# Altium PCB PCB1(zadanie_11).PcbDoc
Units mm, origin at the board's own origin, x right, y up, seen from the top; angles counter-clockwise.
Board outline 161 x 63.38 mm, 4 copper layers (Top Layer, Layer 1, Layer 2, Bottom Layer), stack 1.889 mm thick; 49 components, 73 nets, 316 pads, 219 vias.
Unrouted connection lines stored in the file: 1.
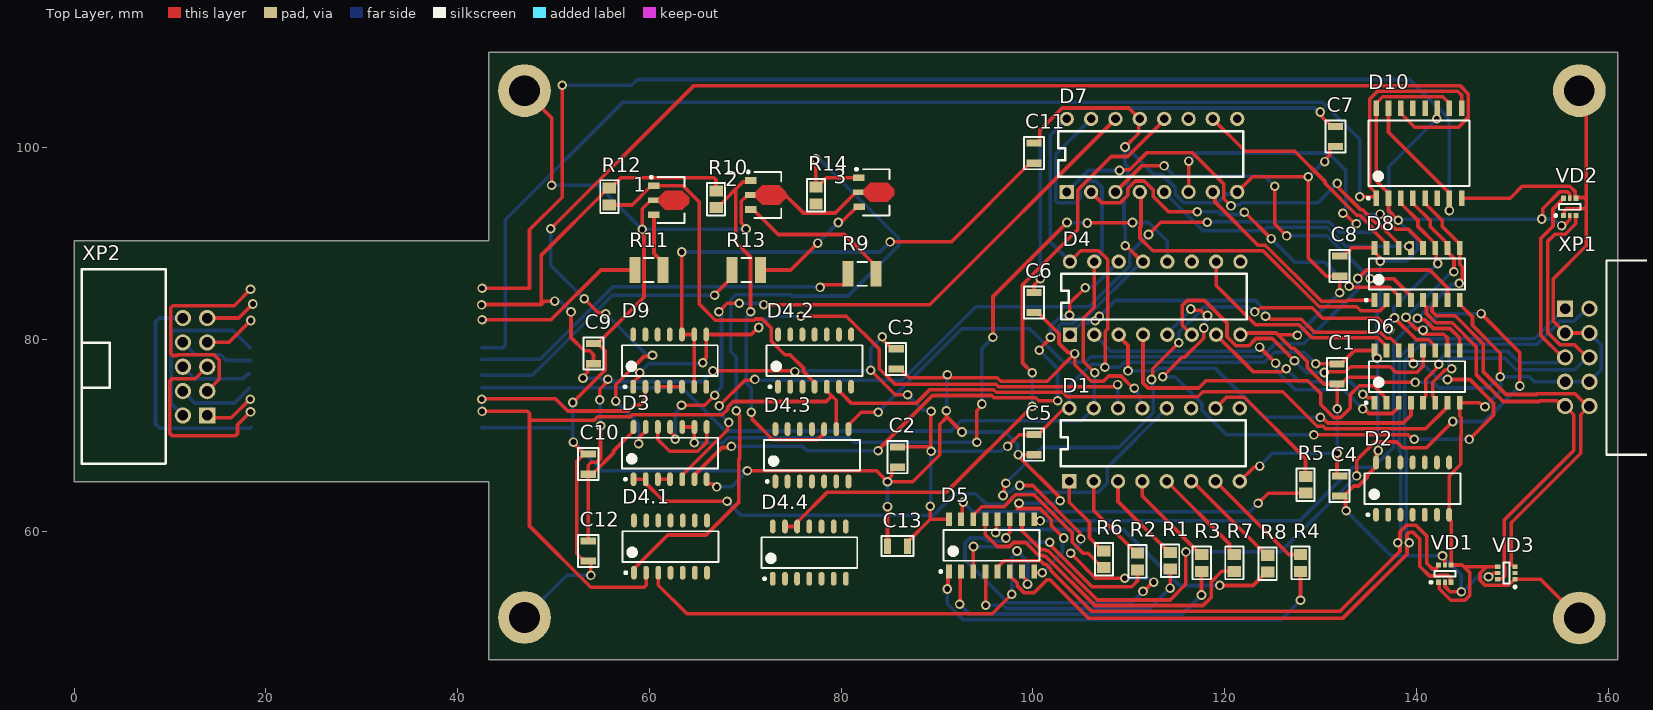
[diagram p0: Top Layer view]
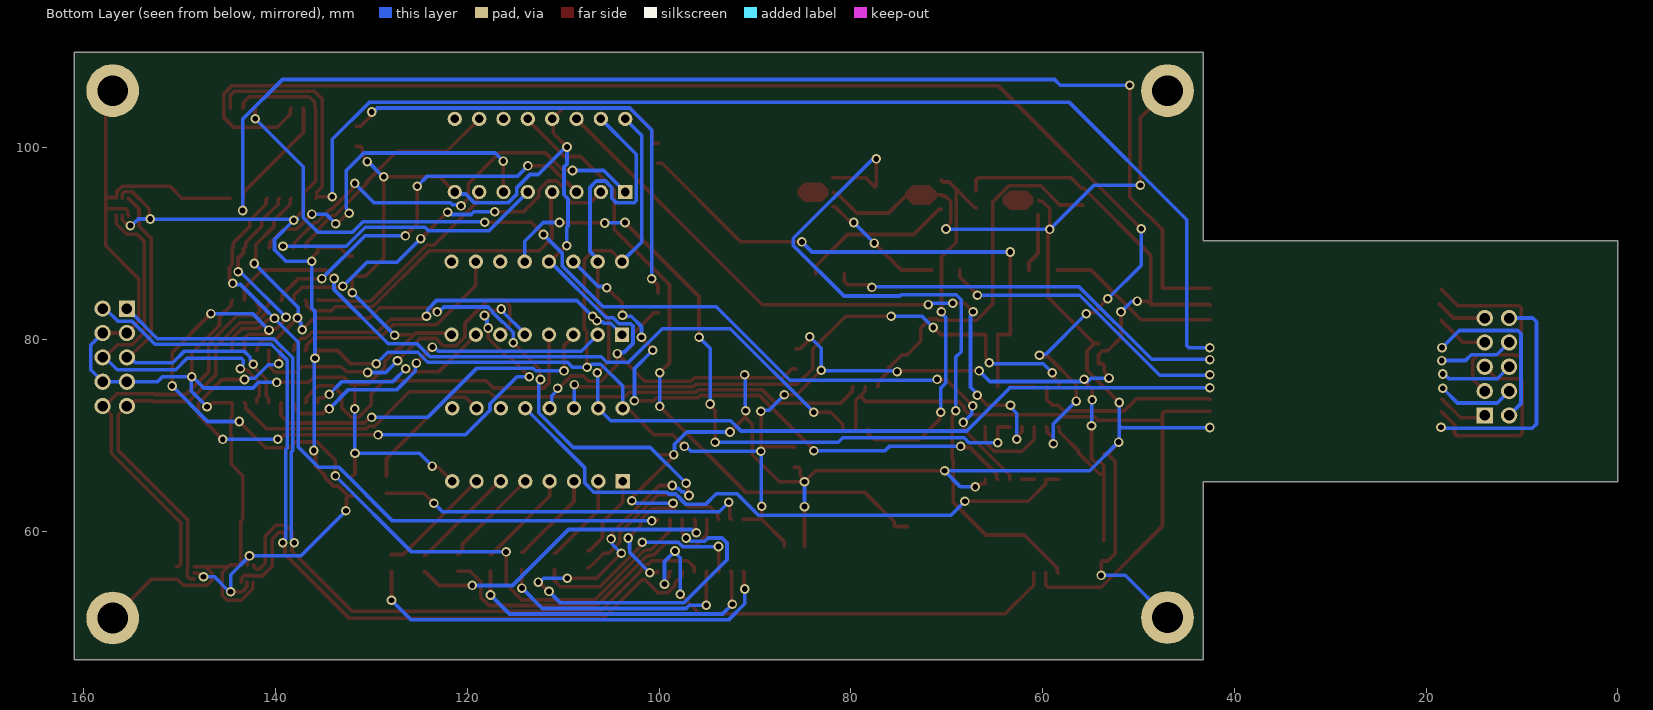
[diagram p1: Bottom Layer view, seen from below]
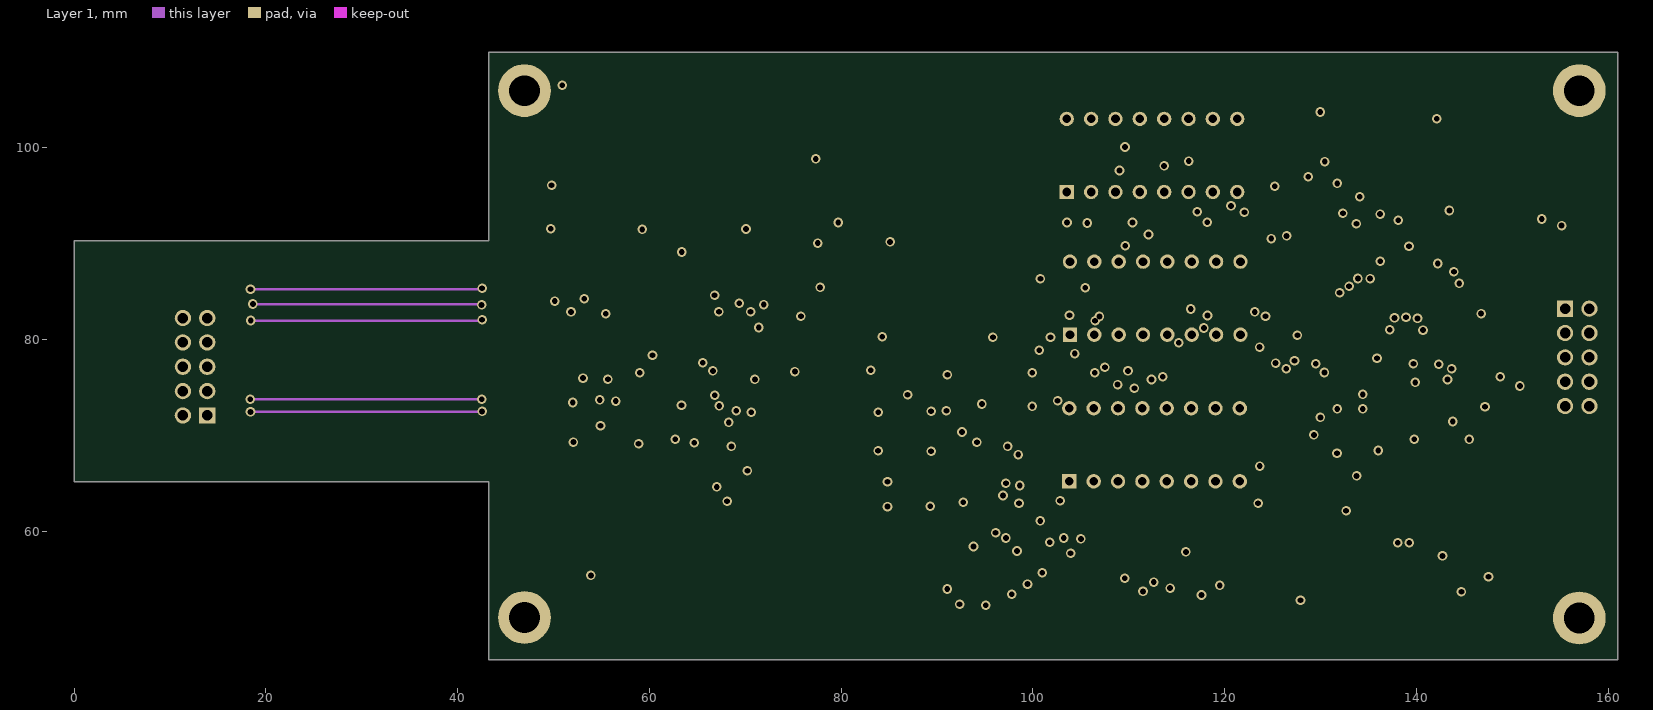
[diagram p2: Layer 1]
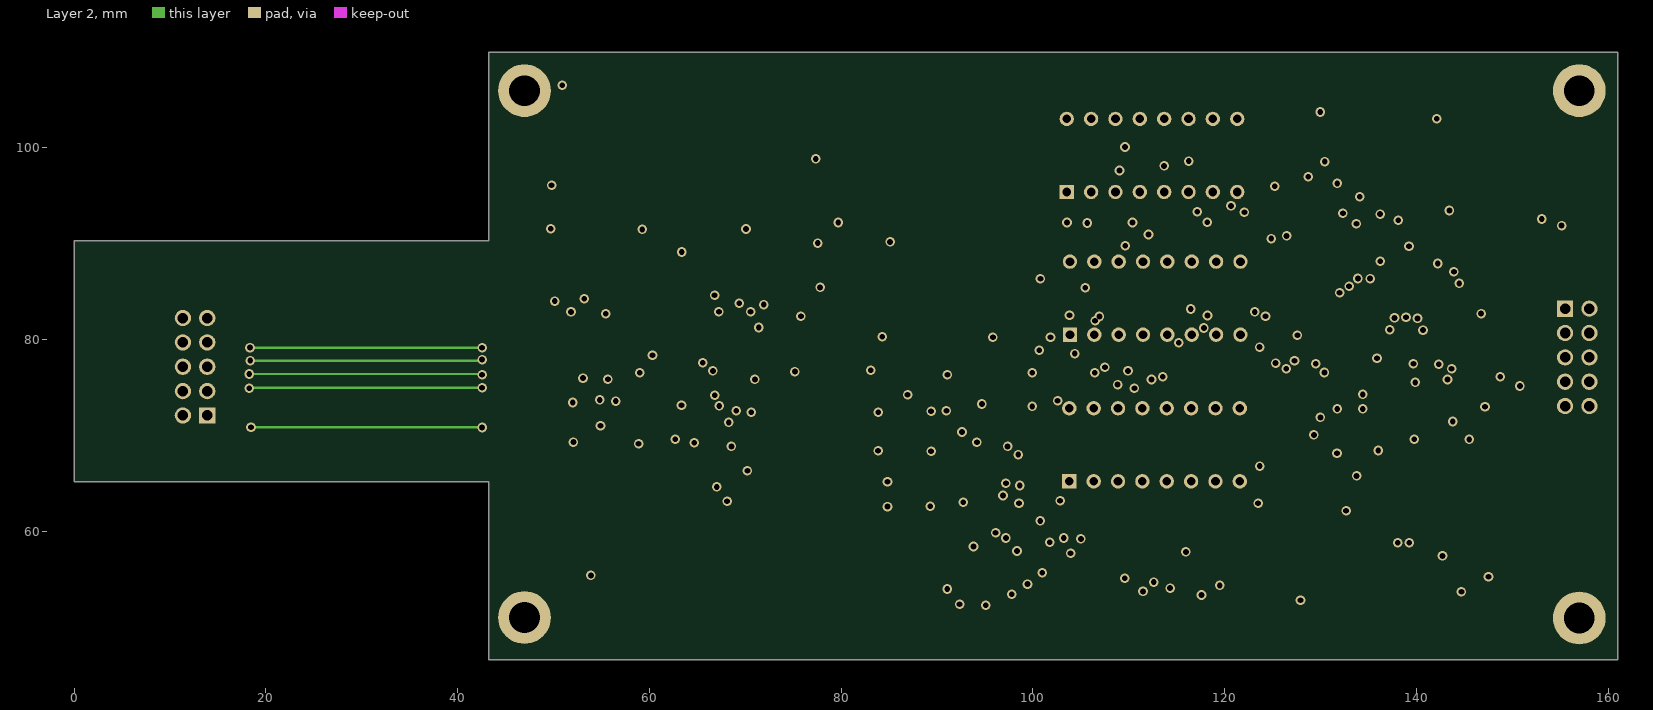
[diagram p3: Layer 2]
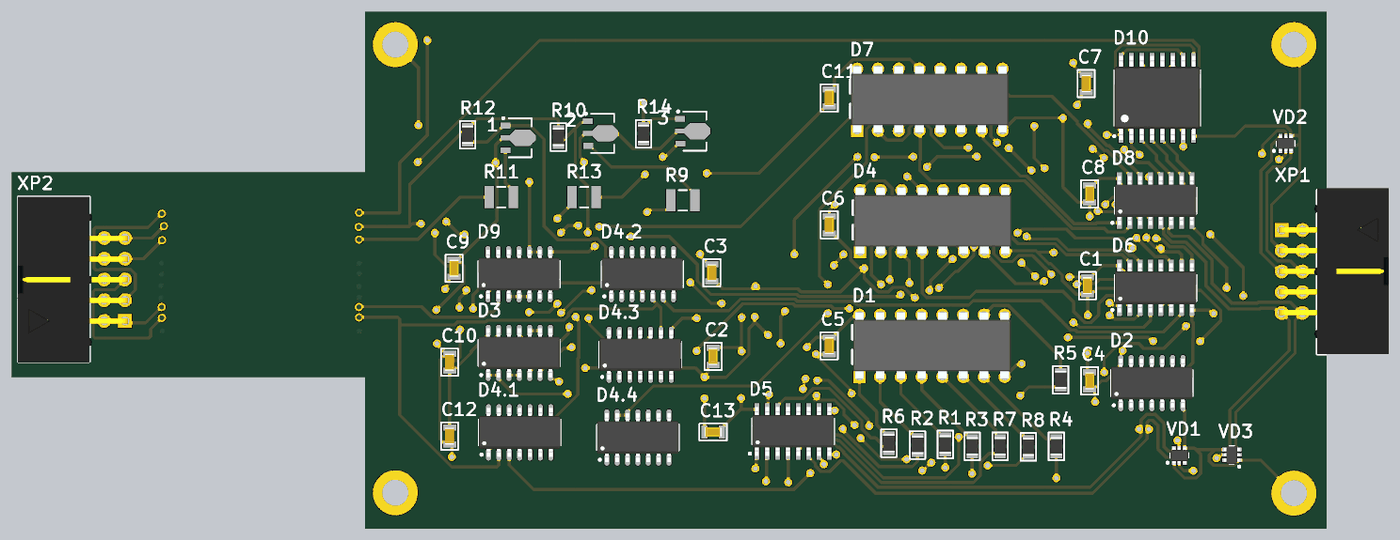
[diagram p4: 3D render of the assembled board from above, using the file's embedded part models]

## Layer stack, top to bottom
Top Solder: solder mask 0.0254, SM-001, Dk 4
Top Layer: signal copper 0.018
Dielectric 4: prepreg 0.0711, PP-006, Dk 4.1
Dielectric 2: prepreg 0.0711, PP-006, Dk 4.1
Layer 1: signal copper 0.035
Dielectric 1: core 1.499, Core-043, Dk 4.3
Layer 2: signal copper 0.035
Dielectric 3: prepreg 0.0711, PP-006, Dk 4.1
Dielectric 5: prepreg 0.0711, PP-006, Dk 4.1
Bottom Layer: signal copper 0.018
Bottom Solder: solder mask 0.0254, SM-001, Dk 4

## Board outline
43.25,65.2 43.25,46.625 160.925,46.625 160.975,46.675 161.004,46.654 161.004,47.972 161,48 161,110 43.25,110 43.25,90.325 0,90.325 0,65.2
board region "Layer Stack Region 1": 17.55,90.325 43.25,90.325 43.25,65.2 17.6,65.2
board region "Layer Stack Region 1": 17.6,65.2 0,65.2 0,90.325 17.55,90.325
board region "Layer Stack Region 1": 43.25,110 161,110 161,48 161.004,47.972 161.004,46.654 160.975,46.675 160.925,46.625 43.25,46.625

## Design rules (kind name [scope] priority, off if disabled: settings)
Clearance [All] p1: gap=0.2 ignorepadtopadclearanceinfootprint=FALSE
DiffPairsRouting [All] p1: maxlimit=0.77 minlimit=0.2 mostfreqgap=0.35 toplayer_minwidth=0.2 toplayer_maxwidth=0.5 toplayer_prefwidth=0.38 midlayer1_mingap=0.254 midlayer1_maxgap=0.254 midlayer1_prefgap=0.254 midlayer1_minwidth=0.381 midlayer1_maxwidth=0.381 midlayer1_prefwidth=0.381 midlayer2_mingap=0.254 midlayer2_maxgap=0.254 midlayer2_prefgap=0.254 midlayer2_minwidth=0.381 midlayer2_maxwidth=0.381 midlayer2_prefwidth=0.381 bottomlayer_minwidth=0.2 bottomlayer_maxwidth=0.5 bottomlayer_prefwidth=0.38 maxuncoupledlength=12.7
HoleSize [All] p1: absolutevalues=TRUE maxlimit=4.5 minlimit=0.3 maxpercent=80.000 minpercent=20.000
PolygonConnect [All] p1: connectstyle=Relief reliefconductorwidth=0.254 reliefentries=4 polygonreliefangle="90 Angle" airgapwidth=0.254
RoutingVias [All] p1: holewidth=0.6 width=1 viastyle="Through Hole" minholewidth=0.4 minwidth=0.8 maxholewidth=1 maxwidth=1.5
SolderMaskExpansion [All] p1: expansion=0.102 istentingtop=FALSE
Width [All] p1: maxlimit=0.5 minlimit=0.2 preferedwidth=0.38 midlayer1_minwidth=0.254 midlayer1_maxwidth=0.254 midlayer1_prefwidth=0.254 midlayer2_minwidth=0.254 midlayer2_maxwidth=0.254 midlayer2_prefwidth=0.254 minimp=50.000000 maximp=50.000000 favimp=50.000000
28 further rules are at their usual default settings.

## Classes and differential pairs
component class МИЭТ_8161930_003_Э3_Лист_2: 1 2 3 C11 C12 C13 D9 D10 R12 R14 XP2 Р3
component class МИЭТ_8161930_003_Э3_Лист_1: C1 C2 C3 C4 C5 C6 C7 C8 C9 C10 D1 D2 D3 D4 D4.1 D4.2 D4.3 D4.4 D5 D6 D7 D8 R1 R2 R3 R4 R5 R6 R7 R8 VD1 VD2 VD3 XP1
differential pair L3: +L3_P -L3_N
differential pair L2: +L2_P -L2_N
differential pair L1: +L1_P -L1_N

## Components (designator, comment, footprint, x,y, rotation, side; value= is the part's Value field where it differs from the comment)
1 "Транзистор" SOT89-150P340X160-3N 62,94.55 r0 top
2 "Транзистор" SOT89-150P340X160-3N 72.1,95.1 r0 top
3 "Транзистор" SOT89-150P340X160-3N 83.4,95.375 r0 top
C1 "" 0805_N 131.7,76.425 r90 top
C2 "" 0805_N 85.875,67.75 r90 top
C3 "" 0805_N 85.725,78 r90 top
C4 "" 0805_N 131.975,64.75 r90 top
C5 "" 0805_N 100.1,69.05 r90 top
C6 "" 0805_N 100.1,83.875 r90 top
C7 "" 0805_N 131.55,101.2 r270 top
C8 "" 0805_N 131.975,87.675 r90 top
C9 "" 0805_N 54.175,78.55 r90 top
C10 "" 0805_N 53.625,67.025 r90 top
C11 "" 0805_N 100.1,99.45 r270 top
C12 "" 0805_N 53.625,57.975 r90 top
C13 "" 0805_N 85.875,58.475 r180 top
D1 "DIP-16" DIP16 103.79,65.23 r90 top
D2 "74AC00SC" SO14-N 139.585,64.475 r90 top
D3 "74AC00SC" SO14-N 62.155,68.175 r90 top
D4 "DIP-16" DIP16 103.855,80.525 r90 top
D4.1 "74AC00SC" SO14-N 62.2,58.425 r90 top
D4.2 "74AC00SC" SO14-N 77.225,77.825 r90 top
D4.3 "74AC00SC" SO14-N 76.95,67.95 r90 top
D4.4 "74AC00SC" SO14-N 76.675,57.8 r90 top
D5 "SOIC-16" SO16-N 95.675,58.55 r90 top
D6 "SOIC-16" SO16-N 140.05,76.15 r90 top
D7 "DIP-16" DIP16 103.52,95.405 r90 top
D8 "SOIC-16" SO16-N 140.05,86.85 r90 top
D9 "74AC00SC" SO14-N 62.125,77.825 r90 top
D10 "MC14520BDWG" SOIC-16W-N 140.25,99.45 r90 top
R1 "0805" RES_0805_2012_N 114.3,56.95 r270 top
R2 "0805" RES_0805_2012_N 110.9,56.875 r270 top
R3 "0805" RES_0805_2012_N 117.6,56.725 r270 top
R4 "0805" RES_0805_2012_N 127.9,56.725 r270 top
R5 "0805" RES_0805_2012_N 128.425,64.875 r270 top
R6 "0805" RES_0805_2012_N 107.4,57.1 r270 top
R7 "0805" RES_0805_2012_N 121,56.725 r270 top
R8 "0805" RES_0805_2012_N 124.475,56.65 r270 top
R9 "Резистор" CAPC3225X06N 82.175,86.875 r0 top
R10 "0805" RES_0805_2012_N 66.95,94.65 r90 top
R11 "Резистор" CAPC3225X06N 59.95,87.275 r0 top
R12 "0805" RES_0805_2012_N 55.825,94.925 r90 top
R13 "Резистор" CAPC3225X06N 70.1,87.275 r0 top
R14 "0805" RES_0805_2012_N 77.375,95.05 r90 top
VD1 "SOT-363" SOT363_NXP 142.95,55.6 r90 top
VD2 "SOT-363" SOT363_NXP 155.975,93.85 r90 top
VD3 "SOT-363" SOT363_NXP 149.375,55.675 r180 top
XP1 "TE_1-1634689-0" BH-10R 156.755,78.16 r180 top
XP2 "TE_1-1634689-0" BH-10R 12.62,77.18 r0 top

## Footprints (in the part's own frame and the unit in brackets; to place one, negate y for a bottom-side part, rotate by r counter-clockwise, add the part's x,y. Pads: shape width x height; smd on the part's side, far side on the other; paste and mask are expansions set on the pad)
0805_N [mm] "Резистор, конденсатор"
  rect 0.75x1.6 smd: 1(-1.05,0) 2(1.05,0)
  silkscreen extent -1.68,-1.05 1.68,1.05, body extent -1.05,-0.58 1.05,0.58, height 1
BH-10R [mm] "Разъем угловой 2х5х2,54 типа ВН"
  rect 1.7x1.7 hole 1.1: 1(1.27,-5.08)
  round 1.7 hole 1.1: 2(-1.27,-5.08) 3(1.27,-2.54) 4(-1.27,-2.54) 5(1.27,0) 6(-1.27,0) 7(1.27,2.54) 8(-1.27,2.54) 9(1.27,5.08) 10(-1.27,5.08)
  silkscreen extent -11.8,-10.1 -3.05,10.15, body extent -11.85,-10.2 1.65,10.15, height 9.13
CAPC3225X06N [mm] "Chip Capacitor, 2-Leads, Body 3,20x2,50mm, IPC Medium Density"
  rect 1.15x2.7 smd: 1(-1.475,0) 2(1.475,0)
  silkscreen extent -0.5,-1.25 0.5,1.25, body extent -1.7,-1.35 1.7,1.35, height 0.6
DIP16 [mm]
  rect 1.5x1.5 hole 0.9: 1(0,0)
  round 1.5 hole 0.9: 2(0,-2.54) 3(0,-5.08) 4(0,-7.62) 5(0,-10.16) 6(0,-12.7) 7(0,-15.24) 8(0,-17.78) 9(7.62,-17.78) 10(7.62,-15.24) 11(7.62,-12.7) 12(7.62,-10.16) 13(7.62,-7.62) 14(7.62,-5.08) 15(7.62,-2.54) 16(7.62,0)
  silkscreen extent 1.58,-18.41 6.35,0.89, body extent -0.25,-18.54 7.95,0.76, height 5.08
RES_0805_2012_N [mm] "Rezistor 0805"
  rect 1.15x1.4 smd: 1(-0.875,0) 2(0.875,0)
  silkscreen extent -1.7,-0.95 1.7,0.95, body extent -1.1,-0.7 1.1,0.7, height 0.6
SO14-N [mm]
  oval 1.45x0.6 smd: 1(-2.725,3.81) 2(-2.725,2.54) 3(-2.725,1.27) 4(-2.725,0) 5(-2.725,-1.27) 6(-2.725,-2.54) 7(-2.725,-3.81) 8(2.725,-3.81) 9(2.725,-2.54) 10(2.725,-1.27) 11(2.725,0) 12(2.725,1.27) 13(2.725,2.54) 14(2.725,3.81)
  silkscreen extent -2.85,-5 1.6,5, body extent -3,-5 3,5, height 1.45
SO16-N [mm] "SOIC, 16-Leads, Body 9,90x3,90mm, Pitch 1,27mm, IPC Medium Density"
  rect 1.45x0.6 smd: 1(-2.725,4.445) 2(-2.725,3.175) 3(-2.725,1.905) 4(-2.725,0.635) 5(-2.725,-0.635) 6(-2.725,-1.905) 7(-2.725,-3.175) 8(-2.725,-4.445) 9(2.725,-4.445) 10(2.725,-3.175) 11(2.725,-1.905) 12(2.725,-0.635) 13(2.725,0.635) 14(2.725,1.905) 15(2.725,3.175) 16(2.725,4.445)
  silkscreen extent -2.85,-5 1.6,5.42, body extent -3,-5 3,5, height 1.45
SOIC-16W-N [mm] "SOIC, 16-Leads, Body 10,30x7,50mm, Pitch 1,27mm, IPC Medium Density"
  rect 1.62x0.58 smd: 1(-4.69,4.445) 2(-4.69,3.175) 3(-4.69,1.905) 4(-4.69,0.635) 5(-4.69,-0.635) 6(-4.69,-1.905) 7(-4.69,-3.175) 8(-4.69,-4.445) 9(4.69,-4.445) 10(4.69,-3.175) 11(4.69,-1.905) 12(4.69,-0.635) 13(4.69,0.635) 14(4.69,1.905) 15(4.69,3.175) 16(4.69,4.445)
  silkscreen extent -4.81,-5.25 3.4,5.41, body extent -5.15,-5.25 5.15,5.25, height 2.65
SOT89-150P340X160-3N [mm] "SOT89, 3-Leads, Body 4,60x2,60mm, Pitch 1,50mm, Lead Span 3,4mm, IPC Medium Density"
  rect 1.2x0.7 smd: 1(-1.55,1.5) 2(-1.524,-1.524)
  rect 1.1x0.6 smd: 3(-1.6,0)
  Top Layer region: -1.05,0.3 -0.35,1 1.45,1 2.15,0.3 2.15,-0.3 1.45,-1 -0.35,-1 -1.05,-0.3
  silkscreen extent -1.92,-2.4 1.65,2.52, body extent -1.15,-2.4 1.65,2.4, height 1.6
SOT363_NXP [mm]
  rect 0.55x0.5 smd: 1(-0.9,0.65) 3(-0.9,-0.65) 4(0.9,-0.65) 6(0.9,0.65)
  rect 0.55x0.4 smd: 2(-0.9,0) 5(0.9,0)
  silkscreen extent -1.02,-1.1 0.3,1.57, body extent -1.15,-1.1 1.15,1.1, height 1.1

## Part data
1 2 3: "Транзистор 2Т665А9 АЕЯР.432140.605 ТУ"
C1 C2 C3 C4 C5 C6 C7 C8 C9 C10 C11 C12 C13: library part К10-79_0805_Н90, "Чип конденсатор 0805 Н90 ряд Е6", Case=0805, Manufacturer="ООО \"Кулон\"", Tolerance=+80%-20%, BOM="Конденсатор К10-79-*-B-*+80%-20%-Н90 АЖЯР.673511.004 ТУ", Created_by=Желобаев, Issue_date=19_12_2018, Name="Конденсатор К10-79", TKE=Н90, TU="АЖЯР.673511.004 ТУ", Type=K10-79, Version=0, Weight=0.05
D1 D4 D7: library part HCF4017BEY, "Декадный счетчик c 10 декодированными выходами", Manufacturer=STMicroelectronics, Power_Voltage="-0.5 -22 V", BOM="Микросхема HCF4017BEY \"STMicroelectronics\"", Case=DIP-16, Created_by=Желобаев, Issue_date=05.04.2019, Name="Микросхема HCF4017BEY", Version=0
D2 D3 D4.1 D4.2 D4.3 D4.4 D9: "4 элемента 2И-НЕ TTL SOIC-14", Case=SOIC-14, Manufacturer="ON Semiconductor", Power_Voltage="4.5 - 5.5 V", BOM="Микросхема 74AC00SC \"ON Semiconductor\"", Created_by=Желобаев, Issue_date=10.04.2019, Name="Микросхема 74AC00SC", Version=0
D5 D6 D8: library part 74HC151D, "мультиплексор 8 канальный CMOS", Manufacturer="NXP Semiconductors", Power_Voltage="2.0 -6.0 V", BOM="Микросхема 74YC151D \"NXP Semiconductors\"", Case=SOIC-16, Created_by=Желобаев, Issue_date=05.04.2019, Name="Микросхема 74YC151D", Version=0
D10: "Два двоичных счетчика", Case=SOIC-16, Manufacturer=Motorola, BOM="Микросхема MC14520BDWG \"Motorola\"", Created_by=Желобаев, Issue_date=6.01.2019, Name="Микросхема MC14520BDWG", Version=0
R1 R2 R3 R4 R5 R6 R7 R8 R10 R12 R14: library part Р1-12-0,125-5%, "Резистор от 0,75 Ом до 2 МОм", Manufacturer="ОАО \"НПО \"Эркон\"", Tolerance=5%, Voltage=150, BOM="Резистор Р1-12-0,125 * 5%-M-\"A\" АЛЯР.434110.005 ТУ", ComponentLink1Description="Сайт производителя", ComponentLink1URL=https://www.erkon-nn.ru/catalog/rezistory-obshchego-primeneniya/, Created_by=Желобаев, Hight=0,5, Issue_date=05_12_2018, LiveStatus=Производится, Name="Резистор Р1-12-0,125", Reliability=0,000001, Size=0805, TKR=M, TU="АЛЯР.434110.005 ТУ", Type="Р1-12-0,125±5%-М-\"А\"", Version=00, Weight=0,01
R9 R11 R13: "Резистор Р1-12-0,1 4,7 кОм 5%-M-\"A\" АЛЯР.434110.005 ТУ"
VD1 VD2 VD3: library part BAV99S, "Высокоскоростные, переключающие диоды", Manufacturer=Nexperia, Voltage=100, BOM="Диод BAV99S \"Nexperia\"", Case=SOT-363, Created_by=Желобаев, Issue_date=07.01.2019, Name="Диод BAV99S", Version=0
XP1 XP2: "Вилка типа BH-10R угловая правая двухрядная 2х5х2.54", Case=BH-10R, Manufacturer="TE Connectivity", BOM="Вилка угловая TE_1-1634689-0 \"TE Connectivity\"", Created_by=Желобаев, Issue_date=13.05.2019, Name="Вилка угловая TE_1-1634689-0", Version=0

## Free pads (board coordinates)
  round 5.5 hole 3.2: 1(-315.3,94.275) M1(46.975,51.025) M2(46.975,105.975) M3(156.975,105.975) M4(156.975,50.975)

## Via types
v1: diameter 1, hole 0.6, Top Layer to Bottom Layer, 199 vias
v2: diameter 1, hole 0.6, Top Layer to Layer 1, 10 vias
v3: diameter 1, hole 0.6, Layer 2 to Bottom Layer, 10 vias

## Nets (pads, with @x,y where several pads share a name; then routed paths per layer and width w, separated by ;. In a path a pad name is that pad's centre, name@x,y a point inside that pad or via, vN(x,y) a via of type N, cw(c..) or ccw(c..) an arc to the next point about the centre after c; other vN are vias at no path point)
+5: C1.2 C2.2 C3.2 C4.1 C5.2 C8.2 C9.1 C10.1 C12.2 C13.1 D1.16 D2.14 D3.14 D4.16 D5.16 D6.16 D7.16 D8.16 D10.2 D10.10 D10.16 R10.2 R12.2 VD1.2 VD1.5 VD2.2 VD2.5 VD3.2 VD3.5 XP2.9 | length 366.5
  Top Layer w0.38: XP2.9 17.185,82.26 v2(18.65,83.725) ; v2(42.5,83.625) 42.575,83.625 42.625,83.675 48.725,83.675 48.74,83.69 ; v1(50.125,84.025) 50.105,84.005 49.055,84.005 48.74,83.69 ; v1(51.825,82.9) 51.825,80.223 53.213,78.835 53.785,78.835 54.175,78.445 C9.1 53.75,77.5 53.565,77.315 53.565,76.658 53.075,76.168 v1(53.075,76) ; C12.2 C10.1 ; v1(54.825,73.725) 54.825,74.849 55.674,75.697 v1(55.674,75.865) ; v1(54.9,71.025) 54.9,67.623 54.506,67.229 53.934,67.229 53.625,66.92 C10.1 ; D3.14 58.273,70.828 58.273,70.403 56.254,68.384 56.254,68.179 54.05,65.975 C10.1 ; v1(66.625,76.75) 75.1,76.75 v1(75.175,76.675) ; R10.2 66.95,96.67 66.727,96.893 57.043,96.893 55.95,95.8 55.7,95.8 48.74,88.84 48.74,83.69 ; v1(83.075,76.825) 85.65,74.25 v1(86.925,74.25) ; v1(84.275,80.3) 84.394,80.181 84.394,79.956 85.3,79.05 C3.2 ; C2.2 85.913,68.838 v1@89.338,68.838 ; C13.1 86.925,58.9 89.3,61.275 ; v1(89.3,62.625) 89.3,61.275 ; v1(89.375,68.36) 89.338,68.397 v1@89.338,68.838 ; v1(89.375,72.535) 89.338,72.498 v1@89.338,68.838 ; D5.16 89.3,61.275 ; v1(97.35,68.875) 98.562,70.087 100.087,70.087 C5.2 100.525,70.1 103.061,72.636 103.576,72.636 D1.16 ; D4.16 104.995,89.285 106.867,89.285 107.795,88.357 107.795,84.761 107.815,84.741 107.815,81.176 107.535,80.896 107.535,77.163 v1(107.501,77.129) ; v1(129.494,77.486) 129.5,77.481 131.694,77.481 C1.2 132.125,77.475 133.525,78.875 D6.16 135.605,78.45 v1@135.961,78.094 ; C4.1 C4.1@132.4,63.7 ; C8.2 132.4,88.725 133.25,89.575 D8.16 135.605,89.15 v1@136.106,88.649 ; v1(132.65,62.175) 132.585,62.24 132.585,63.515 C4.1@132.4,63.7 ; v1@135.817,68.099 135.817,66.817 134.83,65.83 134.83,65.622 133.957,64.749 133.449,64.749 C4.1@132.4,63.7 ; v1(138.088,92.471) 137.075,93.484 137.075,95.28 135.805,96.55 D10.16 135.905,104.24 135.905,104.76 136.485,105.34 142.745,105.34 143.325,104.76 143.325,104.24 D10.10 ; v1(142.71,57.456) 142.71,57.289 142.94,57.059 142.94,56.51 VD1.5 ; VD1.2 142.96,54.69 142.96,54.263 143.498,53.725 v1(144.675,53.725) ; v1(147.5,55.275) 147.648,55.275 148.038,55.665 148.465,55.665 VD3.5 ; v1(153.064,92.586) 153.154,92.676 153.154,93.656 154.913,95.415 155.737,95.415 155.965,95.187 155.965,94.76 VD2.5 ; v1(155.125,91.9) 155.244,92.019 155.47,92.019 155.965,92.513 155.965,92.94 VD2.2
  Layer 1 w0.254: v2(18.65,83.725) 18.675,83.7 42.425,83.7 v2(42.5,83.625)
  Bottom Layer w0.38: v1(50.125,84.025) 50.7,84.025 v1(51.825,82.9) ; v1(53.075,76) 54.932,76 55.287,75.646 v1@55.674,75.646 ; v1(54.825,73.725) 54.863,73.688 54.863,71.062 v1(54.9,71.025) ; v1(55.674,75.865) v1@55.674,75.646 ; v1(66.625,76.75) 65.521,75.646 v1@55.674,75.646 ; v1(75.175,76.675) 75.25,76.75 83,76.75 v1(83.075,76.825) 83.075,79.1 v1(84.275,80.3) ; v1(86.925,74.25) 88.521,72.654 89.256,72.654 v1(89.375,72.535) ; v1(89.3,62.625) 89.337,62.663 89.337,68.322 v1(89.375,68.36) ; v1@89.3,68.36 96.667,68.36 97.182,68.875 v1(97.35,68.875) ; D7.16 101.8,101.305 101.8,90.2 D4.16 ; D1.16 103.79,75.172 106.073,77.455 107.007,77.455 107.333,77.129 v1(107.501,77.129) ; v1@107.501,77.122 107.508,77.129 109.029,77.129 109.54,77.64 124.116,77.64 125.166,78.69 128.29,78.69 v1(129.494,77.486) ; v1(132.65,62.175) 137.369,57.456 v1(142.71,57.456) 144.675,55.491 v1(144.675,53.725) 144.805,53.725 146.355,55.275 v1(147.5,55.275) ; v1(135.879,78.075) v1@136.125,78.075 ; v1(136,68.45) 135.94,68.51 135.94,77.89 v1@136.125,78.075 ; v1@137.67,92.586 138.088,92.586 138.111,92.563 153.182,92.563 153.205,92.586 154.298,92.586 154.984,91.9 v1(155.125,91.9) ; v1(138.088,92.471) 140.105,90.454 140.105,89.372 138.908,88.175 v1(136.225,88.175) 136.225,83.298 135.879,82.952 135.879,78.321 v1@136.125,78.075
Canal16_0: D4.3 D6.4 | length 37.8
  Top Layer w0.38: D4.3 108.935,80.368 109.909,79.395 v1(109.909,76.75) ; v1(129.975,71.9) 130.143,71.9 130.733,71.31 138.595,71.31 139.415,72.13 D6.4
  Bottom Layer w0.38: v1(109.909,76.75) 112.866,76.75 113.156,77.04 118.992,77.04 124.132,71.9 v1(129.975,71.9)
Canal16_1: D4.2 D6.3 | length 36.7
  Top Layer w0.38: v1@123.632,79.234 v1@125.3,77.566 ; v1(134.4,72.78) 134.568,72.78 135.038,72.31 137.455,72.31 138.035,72.89 138.035,73.315 D6.3
  Bottom Layer w0.38: D4.2 108.12,78.8 123.03,78.8 123.465,79.235 v1(123.632,79.235) ; v1(125.3,77.565) 125.419,77.446 125.419,76.701 127.32,74.8 132.38,74.8 v1(134.4,72.78)
Canal16_2: D4.4 D6.2 | length 36.4
  Top Layer w0.38: D4.4 111.473,80.523 111.473,75.481 111.994,74.96 117.275,74.96 118.05,75.735 128.668,75.735 130.02,74.383 130.02,73.242 131.371,71.89 132.109,71.89 133.07,72.851 133.07,74.229 134.031,75.19 135.535,75.19 136.765,73.96 136.765,73.535 D6.2
Canal16_3: D4.7 D6.1 | length 19.9
  Top Layer w0.38: D4.7 122.945,76.675 125.955,76.675 126.245,76.965 v1(126.413,76.965) ; v1(134.4,74.3) 134.568,74.3 134.908,73.96 135.495,73.96 135.605,73.85 D6.1
  Bottom Layer w0.38: v1(126.413,76.965) 127.746,75.633 133.068,75.633 v1(134.4,74.3)
Canal16_4: D4.10 D6.15 | length 23.3
  Top Layer w0.38: D4.10 119.095,85.678 123.213,81.56 127.749,81.56 129.106,80.203 135.972,80.203 136.765,79.41 136.765,78.985 D6.15
Canal16_5: D4.1 D6.14 | length 38.5
  Top Layer w0.38: v1(106.473,81.973) v1(106.925,82.425) ; v1(124.25,82.45) 124.418,82.45 124.728,82.14 127.989,82.14 129.346,80.783 136.213,80.783 136.849,80.146 137.299,80.146 138.035,79.41 138.035,78.985 D6.14
  Bottom Layer w0.38: D4.1 105.035,81.705 105.748,81.705 105.897,81.854 106.354,81.854 v1(106.473,81.973) ; v1(106.925,82.425) 108.59,84.09 123.2,84.09 124.131,83.159 124.131,82.569 v1(124.25,82.45)
Canal16_6: D4.5 D6.13 | length 65.6
  Top Layer w0.38: v1(113.525,76.15) 115.541,78.166 115.809,78.166 117.797,80.155 117.797,81.197 v1(117.825,81.225) ; v1(116.45,83.2) 116.569,83.081 117.476,83.081 118.032,82.525 v1(118.2,82.525) ; v1(129.3,70.075) 139.132,70.075 139.582,69.625 v1(139.75,69.625) ; D6.13 139.525,78.765 139.525,77.823 139.675,77.673 v1(139.675,77.505) ; v1(143.225,75.85) 145.563,75.85 148.03,73.384 148.03,72.13 v1(145.5,69.6)
  Bottom Layer w0.38: v1(113.525,76.15) 114.802,76.15 117.63,73.322 117.63,72.638 120.193,70.075 v1(129.3,70.075) ; D4.5 114.015,80.645 116.45,83.08 v1(116.45,83.2) ; v1(117.825,81.225) 117.944,81.343 117.944,82.101 118.2,82.357 v1(118.2,82.525) ; v1(139.675,77.505) 139.794,77.386 140.741,77.386 142.159,75.969 143.106,75.969 v1(143.225,75.85) ; v1(139.75,69.625) 139.762,69.612 145.488,69.612 v1(145.5,69.6)
Canal16_7: D4.6 D6.12 | length 35.7
  Top Layer w0.38: D4.6 115.56,81.52 115.56,83.569 116.081,84.09 117.894,84.09 120.235,81.749 120.235,80.313 121.163,79.385 122.524,79.385 123.264,80.125 124.95,80.125 v1(127.275,77.8) ; v1(130.388,76.585) 130.48,76.677 132.629,76.677 133.137,77.185 137.243,77.185 137.813,76.615 140.044,76.615 140.685,77.256 D6.12
  Bottom Layer w0.38: v1(127.275,77.8) 128.49,76.585 v1(130.388,76.585)
Canal16_8: D7.3 D8.4 | length 40.3
  Top Layer w0.38: D7.3 111.32,98.125 v1(113.675,98.125) ; v1(125.2,96) 125.2,92.075 v1(126.45,90.825) ; v1(135.15,86.375) 137.59,86.375 139.305,84.66 139.305,84.235 D8.4
  Bottom Layer w0.38: v1(113.675,98.125) 114.738,97.062 124.138,97.062 v1(125.2,96) ; v1(126.45,90.825) 130.7,90.825 v1(135.15,86.375)
Canal16_9: D7.2 D8.3 | length 39.9
  Top Layer w0.38: D7.2 107.2,94.265 109.072,94.265 109.87,95.063 109.87,95.747 110.668,96.545 111.612,96.545 112.54,95.617 112.54,94.933 114.123,93.35 v1(117.125,93.35) ; v1(122.05,93.3) 122.075,93.3 124.825,90.55 v1(124.85,90.55) ; v1(132.966,85.577) 133.058,85.485 137.21,85.485 138.035,84.66 138.035,84.235 D8.3
  Bottom Layer w0.38: v1(117.125,93.35) 119.322,93.35 119.613,93.06 121.642,93.06 121.882,93.3 v1(122.05,93.3) ; v1(124.85,90.55) 127.337,88.063 130.479,88.063 v1(132.966,85.577)
Canal16_10: D7.4 D8.2 | length 34.5
  Top Layer w0.38: D7.4 111.265,95.28 111.265,91.856 111.16,91.751 111.16,90.606 112.481,89.285 123.986,89.285 129.841,83.43 133.77,83.43 134.19,83.01 136.185,83.01 136.765,83.59 136.765,84.015 D8.2
Canal16_11: D7.7 D8.1 | length 22.1
  Top Layer w0.38: D7.7 118.974,95.191 118.974,94.367 123.476,89.865 124.226,89.865 130.081,84.01 132.731,84.01 132.846,84.125 D8.1
Canal16_12: D7.10 D8.15 | length 24.2
  Top Layer w0.38: D7.10 122.126,99.659 127.3,99.659 130.451,96.507 130.451,96.315 133.776,92.99 134.094,92.99 135.429,91.654 135.429,91.446 136.765,90.11 136.765,89.685 D8.15
Canal16_13: D7.1 D8.14 | length 43.7
  Top Layer w0.38: v1(109.025,97.65) 109.095,97.72 110.095,97.72 111.89,99.515 116.619,99.515 119.9,96.234 119.9,94.713 120.65,93.963 v1(120.65,93.95) ; v1(131.725,96.3) 131.844,96.181 131.844,95.876 134.15,93.57 134.334,93.57 135.694,92.21 135.935,92.21 138.035,90.11 138.035,89.685 D8.14
  Bottom Layer w0.38: D7.1 105.765,97.65 v1(109.025,97.65) ; v1(120.65,93.95) 120.769,94.069 121.56,94.069 121.756,94.265 129.69,94.265 v1(131.725,96.3)
Canal16_14: D7.5 D8.13 | length 28.5
  Top Layer w0.38: v1(139.215,89.741) 139.305,89.741 139.415,89.631 D8.13
  Bottom Layer w0.38: D7.5 117.725,91.36 124.041,91.36 124.396,91.715 130.63,91.715 132.604,89.741 v1(139.215,89.741)
Canal16_15: D7.6 D8.12 | length 36.2
  Top Layer w0.38: D7.6 116.235,95.42 116.235,98.61 v1(116.25,98.625) ; v1(132.323,93.185) 132.481,93.185 133.566,92.1 v1(133.725,92.1) ; v1(136.2,93.1) 137.796,91.504 139.181,91.504 140.575,90.11 140.575,89.685 D8.12
  Bottom Layer w0.38: v1(116.25,98.625) 117.09,99.465 130.794,99.465 132.615,97.644 132.615,93.645 132.323,93.353 v1(132.323,93.185) ; v1(133.725,92.1) 134.725,93.1 v1(136.2,93.1)
D1.1(1): D1.14 D9.1 D9.8 | length 62.3
  Top Layer w0.38: D9.1 58.315,75.585 58.881,76.151 58.881,76.431 v1(59,76.55) ; v1(65.555,77.6) 65.555,77.768 65.935,78.148 D9.8 70.612,80.55 71.337,81.275 v1(71.4,81.275) ; v1(75.8,82.45) 80.536,82.45 83.965,79.021 83.965,76.983 85.603,75.345 96.16,75.345 96.41,75.095 108.427,75.095 108.653,75.321 v1(108.821,75.321)
  Bottom Layer w0.38: v1(59,76.55) 59.935,77.485 65.44,77.485 v1(65.555,77.6) ; v1(71.4,81.275) 72.575,82.45 v1(75.8,82.45) ; v1(108.821,75.321) 108.845,75.296 108.845,72.875 D1.14
D1.1(2): D1.15 D4.15 D7.15 XP2.4 | length 140.2
  Top Layer w0.38: D4.15 106.395,83.371 105.255,82.231 105.255,77.752 v1(106.442,76.565)
  Layer 2 w0.254: v3(18.281,74.95) 18.305,74.975 42.525,74.975 v3(42.55,75)
  Bottom Layer w0.38: XP2.4 12.59,73.4 16.73,73.4 v3(18.281,74.95) ; v3(42.55,75) 42.575,74.975 63.416,74.975 67.906,70.485 91.451,70.485 92.527,71.56 105.04,71.56 D1.15 106.386,72.906 106.386,76.509 v1(106.442,76.565) ; D7.15 102.38,99.345 102.38,94.493 102.608,94.265 104.432,94.265 104.92,94.753 104.92,95.877 105.588,96.545 106.532,96.545 107.2,95.877 107.2,89.207 106.395,88.402 D4.15
D2.1(1): D5.11 D6.11 D8.11 D10.3 | length 130.7
  Top Layer w0.38: v1(96.875,63.75) 96.994,63.869 96.994,64.676 97.175,64.857 v1(97.175,65.025) ; v1(97.175,59.325) 97.175,59.493 97.58,59.898 D5.11 ; v1(98.625,64.8) 99.965,64.8 104.881,59.884 104.881,59.344 v1(105,59.225) ; v1(103.925,57.725) 106.518,55.132 v1(109.564,55.132) ; v1(111.475,53.75) 111.55,53.75 112.525,54.725 v1(112.6,54.725) ; v1(112.363,75.85) 112.482,75.969 112.482,76.971 v1(115.2,79.69) ; v1(123.136,82.896) 123.304,82.896 123.748,83.34 129.111,83.34 130.203,82.248 136.006,82.248 v1(137.217,81.036) ; v1(137.7,82.275) 139.985,79.99 141.265,79.99 141.845,79.41 141.845,78.985 D6.11 ; D10.3 138.445,94.66 138.445,94.14 140.145,92.44 140.145,91.81 142.042,89.913 v1@142.042,88.28
  Bottom Layer w0.38: v1(96.875,63.75) 97.043,63.75 97.428,64.135 97.65,64.135 98.005,64.49 98.147,64.49 98.457,64.8 v1(98.625,64.8) ; v1(97.175,59.325) 97.007,59.325 96.658,58.976 95.222,58.976 94.868,59.33 93.431,59.33 92.91,58.809 92.91,57.062 97.417,52.555 110.28,52.555 v1(111.475,53.75) ; v1(97.175,65.025) 100.911,68.761 108.933,68.761 112.55,72.378 112.55,75.495 112.363,75.682 v1(112.363,75.85) ; v1(103.925,57.725) 104.881,58.681 104.881,59.106 v1(105,59.225) ; v1(109.564,55.132) 112.025,55.132 112.432,54.725 v1(112.6,54.725) ; v1(115.2,79.69) 115.2,80.783 116.284,81.866 116.375,81.866 117.34,82.831 117.34,82.924 117.831,83.415 122.449,83.415 122.968,82.896 v1(123.136,82.896) ; v1(137.217,81.036) 137.336,81.155 137.336,81.743 137.7,82.107 v1(137.7,82.275) ; v1@137.625,82.6 137.625,83.371 v1(142.204,87.95)
D2.1(2): D5.10 D6.10 D8.10 D10.4 | length 107.6
  Top Layer w0.38: D5.10 98.85,60.075 100.825,58.1 101.266,58.1 101.381,57.985 101.586,57.985 106.711,52.86 114.319,52.86 115.946,54.487 v1(115.946,57.871) ; v1(133.75,65.8) 133.75,67.459 135.631,69.34 137.947,69.34 138.552,68.735 141.035,68.735 v1(143.775,71.475) ; v1(138.904,82.33) 139.022,82.211 139.022,82.037 139.94,81.119 140.556,81.119 v1(140.675,81) ; D10.4 139.715,94.66 139.715,94.14 141.415,92.44 141.415,91.81 143.115,90.11 143.115,89.685 143.335,89.465 143.335,89.04 143.9,88.475 v1(143.9,87.1) ; v1@140.675,80.57 142.825,80.57 143.225,80.17 D6.10 ; v1(146.725,82.725) 150.775,78.675 v1(150.775,75.175)
  Bottom Layer w0.38: v1(115.946,57.871) 125.821,57.871 v1(133.75,65.8) ; v1(138.904,82.33) 143.555,86.981 143.781,86.981 v1(143.9,87.1) ; v1(140.675,81) 142.4,82.725 v1(146.725,82.725) ; v1(143.775,71.475) 147.075,71.475 v1(150.775,75.175)
D2.1(3): D5.9 D6.9 D8.9 D10.5 | length 78.3
  Top Layer w0.38: D5.9 100.12,61.215 100.23,61.105 v1(100.761,61.105) ; v1(140.099,82.219) 140.217,82.1 140.833,82.1 141.759,81.175 143.49,81.175 144.495,80.17 D6.9 ; D10.5 140.985,94.66 140.985,94.14 142.685,92.44 142.685,91.81 144.385,90.11 144.385,89.685 D8.9 144.495,87.859 144.79,87.564 144.79,86.383 144.45,86.043 v1(144.45,85.875)
  Bottom Layer w0.38: v1(100.761,61.105) 127.796,61.105 133.381,66.69 135.499,66.69 137.625,68.816 137.625,79.745 143.636,85.756 144.331,85.756 v1(144.45,85.875)
D3.2(1): D3.5 D10.11 | length 103.3
  Top Layer w0.38: D3.5 63.425,65.875 68.156,70.606 68.156,71.256 v1(68.275,71.375) ; v1(67.275,73.1) 69.93,75.755 70.895,75.755 v1(71,75.86) ; v1(112.05,90.975) 113.325,92.25 v1(118.175,92.25) ; v1(142.1,103.05) 142.127,103.077 142.127,104.112 D10.11
  Bottom Layer w0.38: v1(67.275,73.1) 67.394,72.981 67.394,72.256 v1(68.275,71.375) ; v1(71,75.86) 71.075,75.785 86.381,75.785 94.041,83.445 105.847,83.445 110.075,87.673 110.075,89 v1(112.05,90.975) ; v1(118.175,92.25) 118.22,92.295 130.87,92.295 131.955,91.21 135.569,91.21 137.09,92.731 137.09,98.04 v1(142.1,103.05)
D3.2(2): D3.13 D10.14 | length 145.8
  Top Layer w0.38: v1(49.725,91.575) 64.65,106.5 144.535,106.5 145.375,105.66 145.375,103.168 144.367,102.16 139.805,102.16 138.445,103.52 138.445,104.04 D10.14 ; v1(53.2,84.275) 54.656,82.819 55.331,82.819 v1(55.45,82.7) ; v1(56.5,73.6) 56.5,75.309 59.448,78.256 60.206,78.256 v1(60.325,78.375) ; v1(58.875,69.15) 58.994,69.269 58.994,69.854 59.543,70.403 59.543,70.828 D3.13
  Bottom Layer w0.38: v1(49.725,91.575) 49.725,87.75 v1(53.2,84.275) ; v1(55.45,82.7) 59.656,78.494 60.206,78.494 v1(60.325,78.375) ; v1(56.5,73.6) 58.875,71.225 v1(58.875,69.15)
D4.1(1): 3.1 D4.1.1 R14.2 | length 76.3
  Top Layer w0.38: D4.1.1 58.462,55.772 58.462,56.197 61.901,59.636 65.896,59.636 69.335,63.074 69.335,67.502 69.44,67.607 69.44,72.034 69.045,72.429 v1(69.045,72.597) ; v1(77.35,98.85) 77.35,96.075 77.5,95.925 78.45,96.875 3.1
  Bottom Layer w0.38: v1(69.045,72.597) 69.045,78.187 68.485,78.747 68.485,84.169 69.006,84.69 74.798,84.69 74.928,84.56 80.719,84.56 85.99,89.831 85.99,90.569 77.827,98.731 77.469,98.731 v1(77.35,98.85)
D4.1(2): D4.1.2 D4.2.5 D4.3.9 XP2.5 | length 114.9
  Top Layer w0.38: XP2.5 12.635,75.925 10.223,75.925 10,75.702 10,70.223 10.223,70 16.827,70 17.05,70.223 17.05,71.125 v2(18.4,72.475) ; v2(42.55,72.525) 42.625,72.525 42.65,72.55 47.277,72.55 47.5,72.327 47.5,71.838 ; D4.1.2 59.66,54.405 59.437,54.182 53.884,54.182 47.5,60.566 47.5,71.838 ; D4.2.5 78.495,74.675 79.028,74.142 ; D4.3.9 79.49,73.68 79.028,74.142 ; 47.5,71.838 47.728,71.61 54.226,71.61 54.596,71.98 58.024,71.98 58.215,72.171 67.604,72.171 68.165,72.731 68.165,72.976 68.748,73.559 78.446,73.559 79.028,74.142
  Layer 1 w0.254: v2(18.4,72.475) 42.5,72.475 v2(42.55,72.525)
D4.2(1): 1.1 D4.2.4 R12.1 | length 38.5
  Top Layer w0.38: R12.1 58.2,94.05 60.2,96.05 63.502,96.05 65.191,94.36 65.191,83.725 66.881,82.035 70.901,82.035 71.031,82.165 71.769,82.165 72.725,81.209 72.725,79.839 74.123,78.441 74.667,78.441 76.065,77.044 76.065,76.685 77.153,75.597 77.153,75.172 D4.2.4
D4.3(1): 2.1 D4.3.10 R10.1 | length 40
  Top Layer w0.38: R10.1 67.075,93.775 69.74,96.44 ; v1(70.55,82.925) 70.55,88.627 69.006,90.171 69.006,95.706 69.74,96.44 ; 2.1 70.39,96.44 69.74,96.44 ; v1(70.625,72.425) 70.744,72.306 70.744,71.671 72.854,69.56 77.53,69.56 78.148,70.178 78.148,70.603 D4.3.10
  Bottom Layer w0.38: v1(70.55,82.925) 70.55,82.757 70.11,82.317 70.11,75.491 70.625,74.976 v1(70.625,72.425)
GND: 1.3 2.3 3.3 C1.1 C2.1 C3.1 C4.2 C5.1 C6.1 C7.2 C8.1 C9.2 C10.2 C11.1 C12.1 C13.2 D1.8 D1.13 D2.7 D3.7 D4.8 D4.13 D5.8 D6.8 D7.8 D7.13 D8.8 D10.8 pad.M1 pad.M2 pad.M3 pad.M4 VD1.1 VD1.4 VD2.1 VD2.4 VD3.1 VD3.4 XP1.3 XP1.4 XP1.7 XP1.8 XP2.10 | length 572
  Top Layer w0.38: pad.M2 49.8,103.15 v1(49.8,96.1) ; v1(52,73.45) 55.365,76.815 55.365,78.835 C9.2@54.6,79.6 ; v1(52.075,69.325) 52.075,69.2 C10.2@53.2,68.075 ; C10.2 C10.2@53.2,68.075 ; v1(53.9,55.425) 53.9,56.74 53.715,56.925 C12.1 53.2,56.925 52.435,57.69 52.435,67.31 C10.2@53.2,68.075 ; C9.2 C9.2@54.6,79.6 ; 1.3 60.29,94.44 60.04,94.44 59.25,93.65 v1(59.25,91.5) 59.25,91.332 59.44,91.142 59.44,84.44 C9.2@54.6,79.6 ; D3.7 65.965,65.085 66.067,64.983 66.524,64.983 66.857,64.65 v1(67.025,64.65) ; v1(70.075,91.55) 70.075,91.718 69.586,92.207 69.586,94.436 70.14,94.99 70.39,94.99 2.3 74.178,95.1 76.068,93.21 79.385,93.21 81.44,95.265 81.69,95.265 3.3 ; v1(70.225,66.325) 70.24,66.34 83.685,66.34 v1(84.825,65.2) ; C13.2 v1(84.825,62.6) ; C3.1 86.15,76.95 87.06,76.04 v1@91.285,76.04 ; C2.1 85.45,66.7 85.265,66.515 85.265,65.808 84.825,65.368 v1(84.825,65.2) ; v1(90.975,72.6) 90.975,71.881 90.265,71.171 90.265,67.991 87.474,65.2 v1(84.825,65.2) ; v1(91.075,76.35) 91.075,76.25 v1@91.285,76.04 ; 91.094,71.881 v1(92.6,70.375) ; 98.348,62.4 100.725,62.4 101.903,61.222 101.903,60.622 v1(103.2,59.325) ; C5.1 100.088,68.013 98.487,68.013 v1(98.475,68.025) 98.475,67.882 102.706,63.652 102.706,63.319 v1(102.824,63.2) ; C6.1 100.525,82.825 102.715,80.635 102.715,79.613 103.66,78.669 104.086,78.669 v1@104.285,78.47 ; C11.1 100.525,100.5 100.71,100.685 100.71,101.827 103.048,104.165 110,104.165 D7.13 111.037,102.922 111.037,101.537 v1(109.6,100.1) ; D5.8 100.12,55.821 100.23,55.711 v1(100.961,55.711) ; v1@104.365,78.39 104.365,77.383 106.073,75.675 107.363,75.675 107.899,76.211 109.189,76.211 110.45,74.95 v1(110.575,74.95) ; v1(104.365,78.55) v1@104.285,78.47 ; v1(109.621,89.804) 109.718,89.804 111.377,88.145 D4.13 ; D7.8 122.895,97 v1(128.7,97) 128.7,88.53 130.605,86.625 C8.1 v1(131.975,84.9) ; D1.8 123.046,66.706 123.531,66.706 v1(123.65,66.825) ; D4.8 121.815,80.705 125.368,80.705 125.548,80.525 ; v1(127.575,80.475) 127.525,80.525 125.548,80.525 ; v1(130.425,98.575) 130.425,98.743 130.94,99.258 130.94,99.965 131.125,100.15 C7.2 ; v1(131.7,68.15) 131.7,65.985 131.885,65.8 C4.2 ; v1(131.74,72.78) 131.74,75.335 C1.1 ; v1(139.875,75.55) 136.551,75.55 136.004,76.097 132.847,76.097 132.125,75.375 C1.1 ; VD1.1 142.36,54.64 142.36,54.043 143.568,52.835 145.044,52.835 145.565,53.356 145.565,55.71 144.95,56.325 ; D8.8 144.605,84.015 144.605,83.59 145.835,82.36 145.835,81.503 148.735,78.603 v1(148.735,76.14) ; D10.8 149.768,94.76 151.003,95.995 155.977,95.995 156.565,95.407 156.565,94.81 VD2.4 156.625,94.765 156.685,94.825 157.477,94.825 157.7,94.602 ; v1(147.14,73.015) 146.972,73.015 146.562,73.425 D6.8 144.495,72.014 144.665,71.844 144.665,70.024 144.61,69.969 144.61,67.014 143.395,65.799 D2.7 143.395,61.265 143.6,61.06 VD1.4 144.775,56.5 144.95,56.325 ; VD3.4 147.291,56.325 ; VD2.1 155.385,93.01 155.385,93.387 155.642,93.643 157.443,93.643 157.7,93.9 ; pad.M4 152.925,55.025 VD3.1 150.215,54.965 150.19,54.965 149.61,54.385 147.131,54.385 146.61,54.906 146.61,55.644 147.291,56.325 ; pad.M3 157.7,105.25 157.7,94.602 ; XP1.4 XP1.3 154.245,81.94 154.245,86.337 157.7,89.792 157.7,93.9 ; v1@91.285,76.04 96.285,76.04 96.65,75.675 101.49,75.675 v1@104.285,78.47 ; 125.548,80.525 126.945,79.127 127.206,79.127 128.604,77.73 128.604,77.101 130.33,75.375 C1.1 ; 144.95,56.325 147.291,56.325 ; 157.7,93.9 157.7,94.602
  Layer 2 w0.254: v3(18.45,70.875) 42.525,70.875 v3(42.55,70.85)
  Bottom Layer w0.38: XP2.10 8.883,82.26 8.5,81.877 8.5,71.2 8.925,70.775 18.35,70.775 v3(18.45,70.875) ; v3(42.55,70.85) 42.775,70.85 42.8,70.825 51.777,70.825 52,71.048 ; pad.M1 51.375,55.425 v1(53.9,55.425) ; v1(49.8,96.1) 54.65,96.1 v1(59.25,91.5) 59.275,91.525 70.05,91.525 v1(70.075,91.55) ; v1(52,73.45) 52,71.048 ; v1(67.025,64.65) 68.55,64.65 v1(70.225,66.325) 55.075,66.325 v1(52.075,69.325) 52,69.4 52,71.048 ; v1(84.825,62.6) v1(84.825,65.2) ; v1(90.975,72.6) 91.025,72.65 91.025,76.3 v1(91.075,76.35) ; v1(92.6,70.375) 97.109,70.375 98.389,69.095 98.389,68.111 v1(98.475,68.025) ; v1(98.543,62.95) 102.406,62.95 102.656,63.2 v1(102.824,63.2) ; v1(100.961,55.711) 103.035,57.785 103.035,58.232 103.081,58.279 103.081,59.206 v1(103.2,59.325) ; v1(104.365,78.55) 104.246,78.669 103.66,78.669 102.715,79.613 102.715,81.437 102.943,81.665 104.175,81.665 104.795,82.285 105.507,82.285 111.367,88.145 D4.13 ; v1(109.621,89.804) 109.621,91.721 109.485,91.856 109.485,94.678 109.915,95.108 109.915,98.019 109.6,98.334 v1(109.6,100.1) 109.73,100.1 112.595,97.235 113.462,97.235 114.82,95.877 114.82,95.193 115.748,94.265 119.232,94.265 120.158,95.191 121.086,95.191 D7.8 ; v1(110.575,74.95) 110.575,74.782 111.196,74.162 111.196,73.064 D1.13 ; v1(123.65,66.825) 124.975,68.15 v1(131.7,68.15) 131.72,68.17 131.72,72.76 v1(131.74,72.78) ; v1(127.575,80.475) 127.575,80.487 131.975,84.887 v1(131.975,84.9) ; v1(128.7,97) 128.775,97 130.35,98.575 v1(130.425,98.575) ; v1(139.875,75.55) 141.757,75.55 142.347,74.96 147.464,74.96 148.645,76.14 v1(148.735,76.14) ; v1(147.14,73.015) 148.775,74.65 148.775,76.15 148.785,76.14 151.777,76.14 152.297,75.62 XP1.7 XP1.8 159.265,76.86 159.265,79.46 XP1.4
L1_N: D5.6 VD1.3 XP1.2 | length 98.8
  Top Layer w0.38: D5.6 97.58,55.4 98.375,54.605 98.375,54.315 99.06,53.63 100.138,53.63 101.469,54.96 101.783,54.96 105.773,50.97 132.337,50.97 139,57.633 139,58.422 v1@139.151,58.573 ; v1@139.116,58.841 139.116,59.111 139,59.228 139,59.682 139.223,59.905 139.668,59.905 140.343,59.23 140.343,56.379 141.358,55.365 142.32,55.365 142.36,55.406 143.271,55.406 143.54,55.137 143.54,54.76 VD1.3
  Bottom Layer w0.38: v1@139,59.048 138.925,59.123 138.925,68.534 138.785,68.674 138.785,77.874 140.441,79.53 152.561,79.53 154.971,81.94 156.458,81.94 157.758,83.24 XP1.2
  other v1: 139.235,58.825
L1_P: D5.5 VD1.6 XP1.1 | length 96.4
  Top Layer w0.38: D5.5 96.31,56.25 97,56.94 100.786,56.94 101.125,56.601 101.33,56.601 101.851,56.08 101.851,55.925 106.076,51.7 132.035,51.7 138.27,57.935 138.27,58.422 138.035,58.657 138.035,58.993 138.27,59.228 138.27,59.985 138.92,60.635 139.971,60.635 141.073,59.532 141.073,56.682 141.66,56.095 142.017,56.095 142.24,56.318 142.24,56.44 VD1.6
  Bottom Layer w0.38: v1@138.27,59.048 138.27,59.119 138.345,59.194 138.345,68.294 138.205,68.434 138.205,78.114 140.201,80.11 152.321,80.11 154.731,82.52 154.765,82.52 XP1.1
  other v1: 138.035,58.825
L2_N: D6.6 VD2.3 XP1.6 | length 41.1
  Top Layer w0.38: D6.6 141.955,73.85 141.685,74.12 141.685,75.569 142.68,76.563 142.686,76.563 142.863,76.74 142.869,76.74 142.999,76.87 143.549,76.87 v1(143.651,76.972) ; VD2.3 156.589,92.914 156.589,92.105 155.494,91.01 154.443,91.01 153.665,90.232 153.665,80.766 154.971,79.46 156.497,79.46 157.797,78.16 XP1.6
  Bottom Layer w0.38: v1(143.651,76.972) 143.651,77.14 143.354,77.436 143.354,77.862 143.577,78.085 149.185,78.085 150.41,76.86 156.497,76.86 157.797,78.16 XP1.6
L2_P: D6.5 VD2.6 XP1.5 | length 38.2
  Top Layer w0.38: D6.5 140.685,73.85 140.955,74.12 140.955,75.871 142.054,76.97 142.054,77.016 142.324,77.286 v1(142.324,77.453) ; VD2.6 155.325,94.725 154.235,93.635 154.235,91.834 152.935,90.534 152.935,80.464 155.239,78.16 XP1.5
  Bottom Layer w0.38: v1(142.324,77.453) 142.324,77.621 142.624,77.921 142.624,78.164 143.275,78.815 149.487,78.815 150.712,77.59 154.602,77.59 155.172,78.16 XP1.5
L3_N: D8.6 VD3.3 XP1.10 | length 44
  Top Layer w0.38: D8.6 141.955,83.7 141.845,83.59 141.833,83.59 141.61,83.367 141.61,82.964 142.089,82.485 144.033,82.485 146.94,79.577 146.94,76.676 149.332,74.285 152.502,74.285 152.597,74.38 156.497,74.38 157.797,73.08 XP1.10 157.12,72.175 157.12,68.155 149.87,60.905 149.87,56.608 150.093,56.385 150.215,56.385 VD3.3
L3_P: D8.5 VD3.6 XP1.9 | length 43.7
  Top Layer w0.38: D8.5 140.685,83.7 140.795,83.59 140.807,83.59 141.03,83.367 141.03,82.724 141.999,81.755 143.73,81.755 146.21,79.275 146.21,76.374 149.029,73.555 152.804,73.555 152.899,73.65 154.602,73.65 155.172,73.08 XP1.9 156.39,72.175 156.39,68.457 149.14,61.207 149.14,56.305 149.181,56.265 149.181,55.354 148.912,55.085 148.535,55.085 VD3.6
Net1_2: 1.2 R11.2 | length 6.1
  Top Layer w0.38: 1.2 60.476,88.999 61.425,88.05 R11.2
Net2_2: 2.2 R9.2 | length 16.3
  Top Layer w0.38: 2.2 70.826,93.576 73.437,90.965 80.335,90.965 83.65,87.65 R9.2
Net3_2: 3.2 R13.2 | length 13
  Top Layer w0.38: R13.2 74.75,87.275 v1(77.55,90.075) ; v1(79.7,92.225) 79.819,92.344 80.119,92.344 81.626,93.851 3.2
  Bottom Layer w0.38: v1(77.55,90.075) v1(79.7,92.225)
NetC6_2: C6.2 C7.1 | length 49.9
  Top Layer w0.38: C6.2 100.1,85.675 v1(100.775,86.35) ; v1(129.95,103.75) 130.069,103.631 130.069,103.306 131.125,102.25 C7.1
  Bottom Layer w0.38: v1(100.775,86.35) 100.775,101.892 103.048,104.165 129.367,104.165 129.782,103.75 v1(129.95,103.75)
NetC11_2: C11.2 D9.6 D9.9 D9.10 | length 55.9
  Top Layer w0.38: v1(63.375,89.15) 63.385,89.14 63.385,80.56 D9.10 D9.9 D9.6 ; v1(85.1,90.2) 91.475,90.2 99.675,98.4 C11.2
  Bottom Layer w0.38: v1(63.375,89.15) 84.05,89.15 v1(85.1,90.2)
NetD1_1: D1.1 R6.1 | length 8.8
  Top Layer w0.38: D1.1 103.79,63.065 105.89,60.965 105.89,59.36 107.275,57.975 R6.1
NetD1_2: D1.2 R2.1 | length 9.4
  Top Layer w0.38: D1.2 106.33,62.195 110.775,57.75 R2.1
NetD1_3: D1.3 R1.1 | length 9.7
  Top Layer w0.38: D1.3 108.87,63.13 114.175,57.825 R1.1
NetD1_4: D1.4 R3.1 | length 10.3
  Top Layer w0.38: D1.4 111.41,63.665 117.475,57.6 R3.1
NetD1_5: D1.5 R7.1 | length 10.6
  Top Layer w0.38: D1.5 120.49,58.69 120.49,57.985 120.875,57.6 R7.1
NetD1_6: D1.6 R8.1 | length 11.2
  Top Layer w0.38: D1.6 116.645,65.23 124.35,57.525 R8.1
NetD1_7: D1.7 R4.1 | length 12
  Top Layer w0.38: D1.7 126.66,57.6 R4.1
NetD1_10: D1.10 R5.1 | length 14.4
  Top Layer w0.38: D1.10 120.17,73.99 122.042,73.99 128.425,67.607 R5.1
NetD1_12: D1.12 D3.1 D3.2 | length 63.9
  Top Layer w0.38: D3.1 D3.2 59.687,65.378 59.687,64.953 61.49,63.15 v1(68.1,63.15)
  Bottom Layer w0.38: v1(68.1,63.15) 69.54,61.71 89.644,61.71 91.874,63.94 94.019,63.94 95.099,62.86 97.244,62.86 97.765,63.381 97.765,63.43 98.245,63.91 98.994,63.91 99.174,64.09 106.802,64.09 107.73,65.018 107.73,66.63 D1.12
NetD3_3: D3.3 D3.4 | length 1.3
  Top Layer w0.38: D3.3 D3.4
NetD3_6: D3.6 D4.14 | length 62.1
  Top Layer w0.38: D3.6 64.767,65.522 64.767,65.947 67.576,68.756 68.431,68.756 v1(68.55,68.875) ; v1(83.85,68.41) 83.85,68.502 89.533,74.185 95.679,74.185 95.929,73.935 100.294,73.935 100.604,73.625 v1(102.564,73.625) ; v1(100.662,78.912) 100.662,79.008 101.825,80.171 v1(101.825,80.266) ; v1(103.806,82.555) 103.818,82.567 103.818,83.793 v1(105.45,85.425)
  Bottom Layer w0.38: v1(68.55,68.875) 75.968,68.875 76.433,68.41 v1(83.85,68.41) ; v1(100.662,78.912) 102.564,77.01 v1(102.564,73.625) ; v1(101.825,80.266) 101.825,81.367 102.895,82.436 103.687,82.436 v1(103.806,82.555) ; v1(105.45,85.425) 105.569,85.544 106.334,85.544 D4.14
NetD3_8: D3.8 D3.12 | length 8.9
  Top Layer w0.38: D3.12 60.885,69.605 62.13,68.36 65.044,68.36 65.965,69.281 D3.8
NetD3_9: D3.9 D3.10 D4.12 | length 73.1
  Top Layer w0.38: D3.10 D3.9 64.685,70.89 64.685,69.26 v1(64.675,69.25) ; v1(94.15,69.3) 94.15,72.602 94.675,73.127 v1(94.675,73.295) ; v1(95.825,80.265) 95.825,84.5 v1(103.55,92.225) ; v1(105.65,92.175) 105.675,92.2 110.35,92.2 v1(110.375,92.225)
  Bottom Layer w0.38: v1(64.675,69.25) 67.666,69.25 68.181,69.765 80.849,69.765 81.314,69.3 v1(94.15,69.3) ; v1(94.675,73.295) 94.675,79.115 v1(95.825,80.265) ; v1(103.55,92.225) 103.575,92.2 105.625,92.2 v1(105.65,92.175) ; v1(110.375,92.225) 112.059,92.225 114.015,90.269 D4.12
NetD3_11: D3.11 D7.14 | length 68.1
  Top Layer w0.38: D3.11 62.155,70.415 62.581,69.989 62.581,69.744 v1(62.7,69.625) ; v1(63.35,73.16) 65.77,73.16 v1(66.821,74.211) ; v1@67.25,82.925 68.125,83.8 v1(69.375,83.8) ; v1(71.925,83.66) 89.235,83.66 D7.14
  Bottom Layer w0.38: v1(62.7,69.625) 62.7,72.342 63.35,72.992 v1(63.35,73.16) ; v1(66.821,74.211) 66.821,74.335 67.515,75.03 67.515,82.492 67.25,82.757 v1(67.25,82.925) ; v1(69.375,83.8) 69.39,83.815 71.602,83.815 71.757,83.66 v1(71.925,83.66)
NetD4.1_3: D4.1.3 D5.7 | length 50.7
  Top Layer w0.38: D4.1.3 60.93,54.405 63.925,51.41 95.751,51.41 v1(97.786,53.445) ; D5.7 98.96,55.715 98.96,55.29 99.31,54.94 99.31,54.638 v1(99.428,54.52)
  Bottom Layer w0.38: v1(97.786,53.445) 97.786,57.251 98.215,57.68 98.215,58.081 99.428,56.868 v1(99.428,54.52)
  other v1: 98.332,57.965
NetD4.2_6: D4.2.6 D6.7 | length 68.5
  Top Layer w0.38: D4.2.6 79.837,75.028 79.837,74.603 81.08,73.36 87.797,73.36 89.202,74.765 95.92,74.765 96.17,74.515 103.096,74.515 103.551,74.06 117.195,74.06 117.705,74.57 126.046,74.57 129.651,70.965 130.258,70.965 130.493,70.73 140.955,70.73 143.115,72.89 143.115,73.315 D6.7
NetD4.3_8: D4.3.8 D8.7 | length 75.2
  Top Layer w0.38: D4.3.8 80.832,70.747 80.832,71.172 82.085,72.425 v1(83.875,72.425) ; v1(133.887,86.379) 134.773,87.265 141.38,87.265 143.225,85.42 D8.7
  Bottom Layer w0.38: v1(83.875,72.425) 83.875,72.459 92.571,81.155 99.678,81.155 103.173,77.66 105.458,77.66 106.018,78.22 123.876,78.22 125.241,79.585 128.233,79.585 133.887,85.239 v1(133.887,86.379)
NetD4.4_12: D4.4.12 D4.4.13 D7.12 | length 68.7
  Top Layer w0.38: D4.4.13 D4.4.12 75.477,60.597 75.477,61.022 78.565,64.11 90.99,64.11 v1(99.925,73.045) ; v1(99.925,76.565) 98.91,77.58 98.91,85.744 104.66,91.494 104.66,95.617 108.155,99.112 109.871,99.112 113.68,102.921 D7.12
  Bottom Layer w0.38: v1(99.925,73.045) v1(99.925,76.565)
NetD9_2: D9.2 XP2.1 | length 49
  Top Layer w0.38: XP2.1 14.14,71.85 16.4,71.85 18.35,73.8 v2(18.375,73.8) ; v2(42.525,73.8) 42.7,73.8 42.75,73.85 50.2,73.85 51.49,72.56 57.784,72.56 58.406,73.183 58.963,73.183 59.585,73.805 D9.2
  Layer 1 w0.254: v2(18.375,73.8) v2(42.525,73.8)
NetD9_3: D9.3 D9.4 D9.5 | length 2.5
  Top Layer w0.38: D9.3 D9.5
NetD10_1: D10.1 D10.9 XP2.2 | length 183.7
  Top Layer w0.38: v1(134.064,94.914) D10.1@135.705,94.914 ; D10.9 144.695,105.52 144.295,105.92 135.933,105.92 135.125,105.112 135.125,95.96 135.705,95.38 D10.1@135.705,94.914 ; D10.1@135.705,94.914 135.705,94.86 D10.1 135.805,94.814 D10.1@135.705,94.914
  Layer 2 w0.254: v3(18.35,79.175) 42.525,79.175 v3(42.55,79.15)
  Bottom Layer w0.38: XP2.2 10.11,73.34 10.11,80.622 10.448,80.96 16.565,80.96 v3(18.35,79.175) ; v3(42.55,79.15) 42.575,79.175 44.737,79.175 44.96,79.398 44.96,92.519 57.186,104.745 130.214,104.745 134.064,100.894 v1(134.064,94.914)
NetD10_7: D10.7 D10.15 XP2.3 | length 192.1
  Top Layer w0.38: XP2.3 15.13,75.88 15.13,77.879 14.589,78.42 10.836,78.42 10.766,78.35 10.298,78.35 10.075,78.573 10.075,83.327 10.298,83.55 16.7,83.55 v2(18.4,85.25) ; v2(42.55,85.375) 42.85,85.375 42.875,85.35 47.5,85.35 47.5,91.457 50.9,94.857 v1(50.9,106.525) ; D10.15 137.075,101.63 143.325,95.38 143.325,94.86 D10.7 v1(143.425,93.476)
  Layer 1 w0.254: v2(18.4,85.25) 42.425,85.25 v2(42.55,85.375)
  Bottom Layer w0.38: v1(50.9,106.525) 58.146,106.525 58.756,107.135 139.274,107.135 143.425,102.984 v1(143.425,93.476)
NetR9_1: R9.1 XP2.8 | length 74.4
  Top Layer w0.38: v1(77.8,85.45) 77.968,85.45 78.233,85.715 80.315,85.715 80.7,86.1 R9.1
  Layer 2 w0.254: v3(18.375,77.825) 42.45,77.825 v3(42.55,77.925)
  Bottom Layer w0.38: XP2.8 12.65,78.42 15.31,78.42 15.905,77.825 v3(18.375,77.825) ; v3(42.55,77.925) 42.575,77.95 48.621,77.95 56.196,85.525 77.725,85.525 v1(77.8,85.45)
NetR11_1: R11.1 XP2.7 | length 47.7
  Top Layer w0.38: XP2.7 16.145,79.72 v2(18.425,82) ; v2(42.55,82.075) 42.65,82.075 42.675,82.1 49.766,82.1 54.941,87.275 R11.1
  Layer 1 w0.254: v2(18.425,82) 42.475,82 v2(42.55,82.075)
NetR13_1: R13.1 XP2.6 | length 63.1
  Top Layer w0.38: v1(66.8,84.635) 66.8,84.675 68.625,86.5 R13.1
  Layer 2 w0.254: v3(18.278,76.425) 42.475,76.425 v3(42.55,76.35)
  Bottom Layer w0.38: XP2.6 12.59,75.94 17.625,75.94 18.11,76.425 v3(18.278,76.425) ; v3(42.55,76.35) 42.6,76.3 47.791,76.3 56.126,84.635 v1(66.8,84.635)
Сanal_A_0: D5.4 R1.2 | length 25.8
  Top Layer w0.38: D5.4 95.058,55.807 95.058,52.317 v1(95.075,52.3) ; v1(114.3,54.1) R1.2
  Bottom Layer w0.38: v1(95.075,52.3) 96.852,52.3 97.177,51.975 112.175,51.975 v1(114.3,54.1)
Сanal_A_1: D5.3 R2.2 | length 23.4
  Top Layer w0.38: D5.3 93.785,55.84 93.785,58.425 v1(93.8,58.44) ; v1(101.75,58.875) 101.869,58.756 101.869,58.523 106.149,54.242 110.287,54.242 110.9,54.855 R2.2
  Bottom Layer w0.38: v1(93.8,58.44) 93.844,58.396 97.505,58.396 97.984,58.875 v1(101.75,58.875)
Сanal_A_3: D5.2 R3.2 | length 32.4
  Top Layer w0.38: v1(92.35,52.425) 92.425,52.5 92.425,55.75 D5.2 ; v1(117.575,53.375) 117.575,55.825 R3.2
  Bottom Layer w0.38: v1(92.35,52.425) 93.38,51.395 115.595,51.395 v1(117.575,53.375)
Сanal_A_4: D5.1 R4.2 | length 44.8
  Top Layer w0.38: v1(91.05,54) 91.14,54.09 91.14,55.735 D5.1 ; v1(127.9,52.825) R4.2
  Bottom Layer w0.38: v1(91.05,54) 91.05,52.466 92.701,50.815 125.89,50.815 v1(127.9,52.825)
Сanal_A_5: D5.15 R5.2 | length 38.8
  Top Layer w0.38: D5.15 92.61,61.385 92.61,62.935 v1(92.725,63.05) ; v1(123.475,62.95) 124.525,64 R5.2
  Bottom Layer w0.38: v1(92.725,63.05) 93.715,62.06 122.585,62.06 v1(123.475,62.95)
Сanal_A_6: D5.14 R6.2 | length 18.7
  Top Layer w0.38: D5.14 93.88,61.385 93.88,61.81 94.666,62.596 96.979,62.596 97.765,63.381 97.765,63.43 98.175,63.84 100.105,63.84 104.09,59.855 104.09,58.876 105.223,57.743 105.757,57.743 107.275,56.225 R6.2
Сanal_A_7: D5.13 R7.2 | length 33.4
  Top Layer w0.38: D5.13 95.04,59.672 96.277,58.435 97.544,58.435 97.963,58.855 99.25,58.855 100.585,57.52 101.026,57.52 101.141,57.405 101.346,57.405 106.471,52.28 117.739,52.28 118.585,53.126 118.585,54.744 119.691,55.85 R7.2
Сanal_A_8: D5.12 R8.2 | length 33
  Top Layer w0.38: v1(96.104,59.866) 96.207,59.969 96.207,61.172 D5.12 ; v1(119.475,54.375) 122.95,54.375 124.35,55.775 R8.2
  Bottom Layer w0.38: v1(96.104,59.866) 96.272,59.866 96.621,60.215 109.444,60.215 115.284,54.375 v1(119.475,54.375)
pads on no net: D1.9 D1.11 D2.1 D2.2 D2.3 D2.4 D2.5 D2.6 D2.8 D2.9 D2.10 D2.11 D2.12 D2.13 D4.1.4 D4.1.5 D4.1.6 D4.1.7 D4.1.8 D4.1.9 D4.1.10 D4.1.11 D4.1.12 D4.1.13 D4.1.14 D4.2.1 D4.2.2 D4.2.3 D4.2.7 D4.2.8 D4.2.9 D4.2.10 D4.2.11 D4.2.12 D4.2.13 D4.2.14 D4.3.1 D4.3.2 D4.3.3 D4.3.4 D4.3.5 D4.3.6 D4.3.7 D4.3.11 D4.3.12 D4.3.13 D4.3.14 D4.4.1 D4.4.2 D4.4.3 D4.4.4 D4.4.5 D4.4.6 D4.4.7 D4.4.8 D4.4.9 D4.4.10 D4.4.11 D4.4.14 D4.9 D4.11 D7.9 D7.11 D9.7 D9.11 D9.12 D9.13 D9.14 D10.6 D10.12 D10.13 R14.1

## Silkscreen, mask and mechanical layers (free items; w line width, h text height)
Mechanical 1:
  lines w0.254: 43.275,109.975 43.325,109.925 43.325,46.725 159.525,46.725 160.975,48.175 160.975,109.975 43.275,109.975